# Allegro board flyer.brd
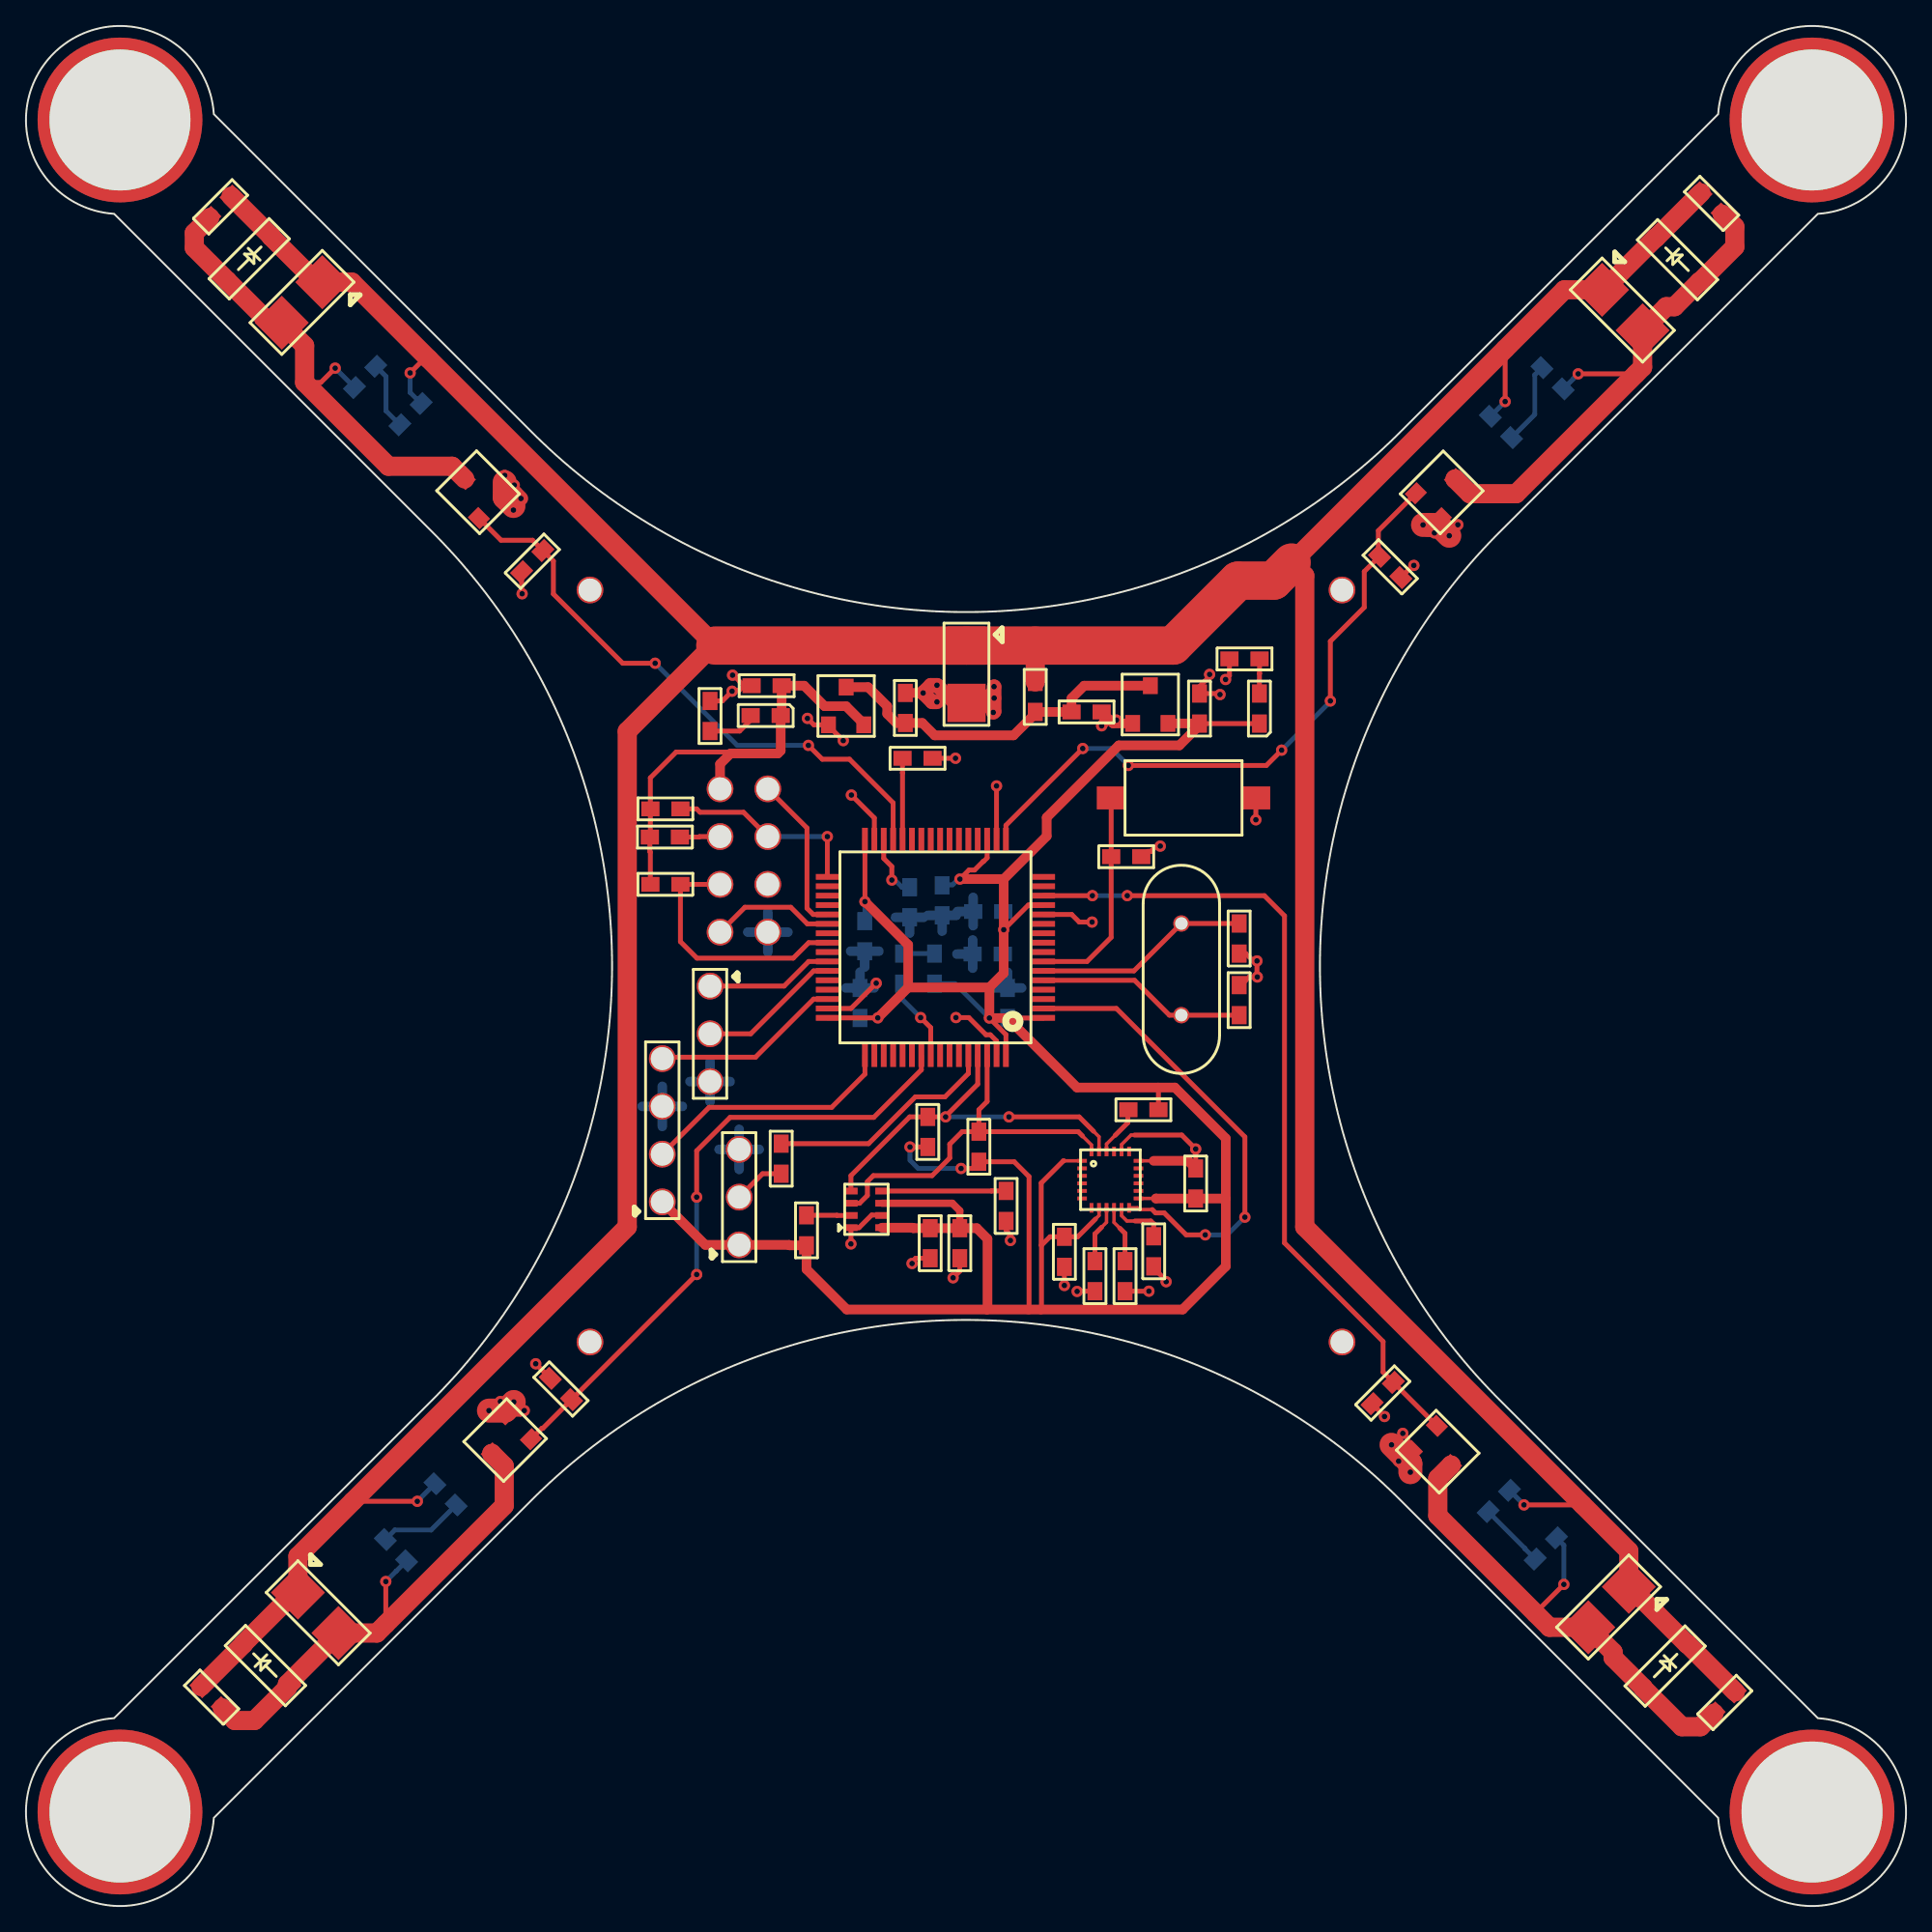
[diagram p0: board, top side]
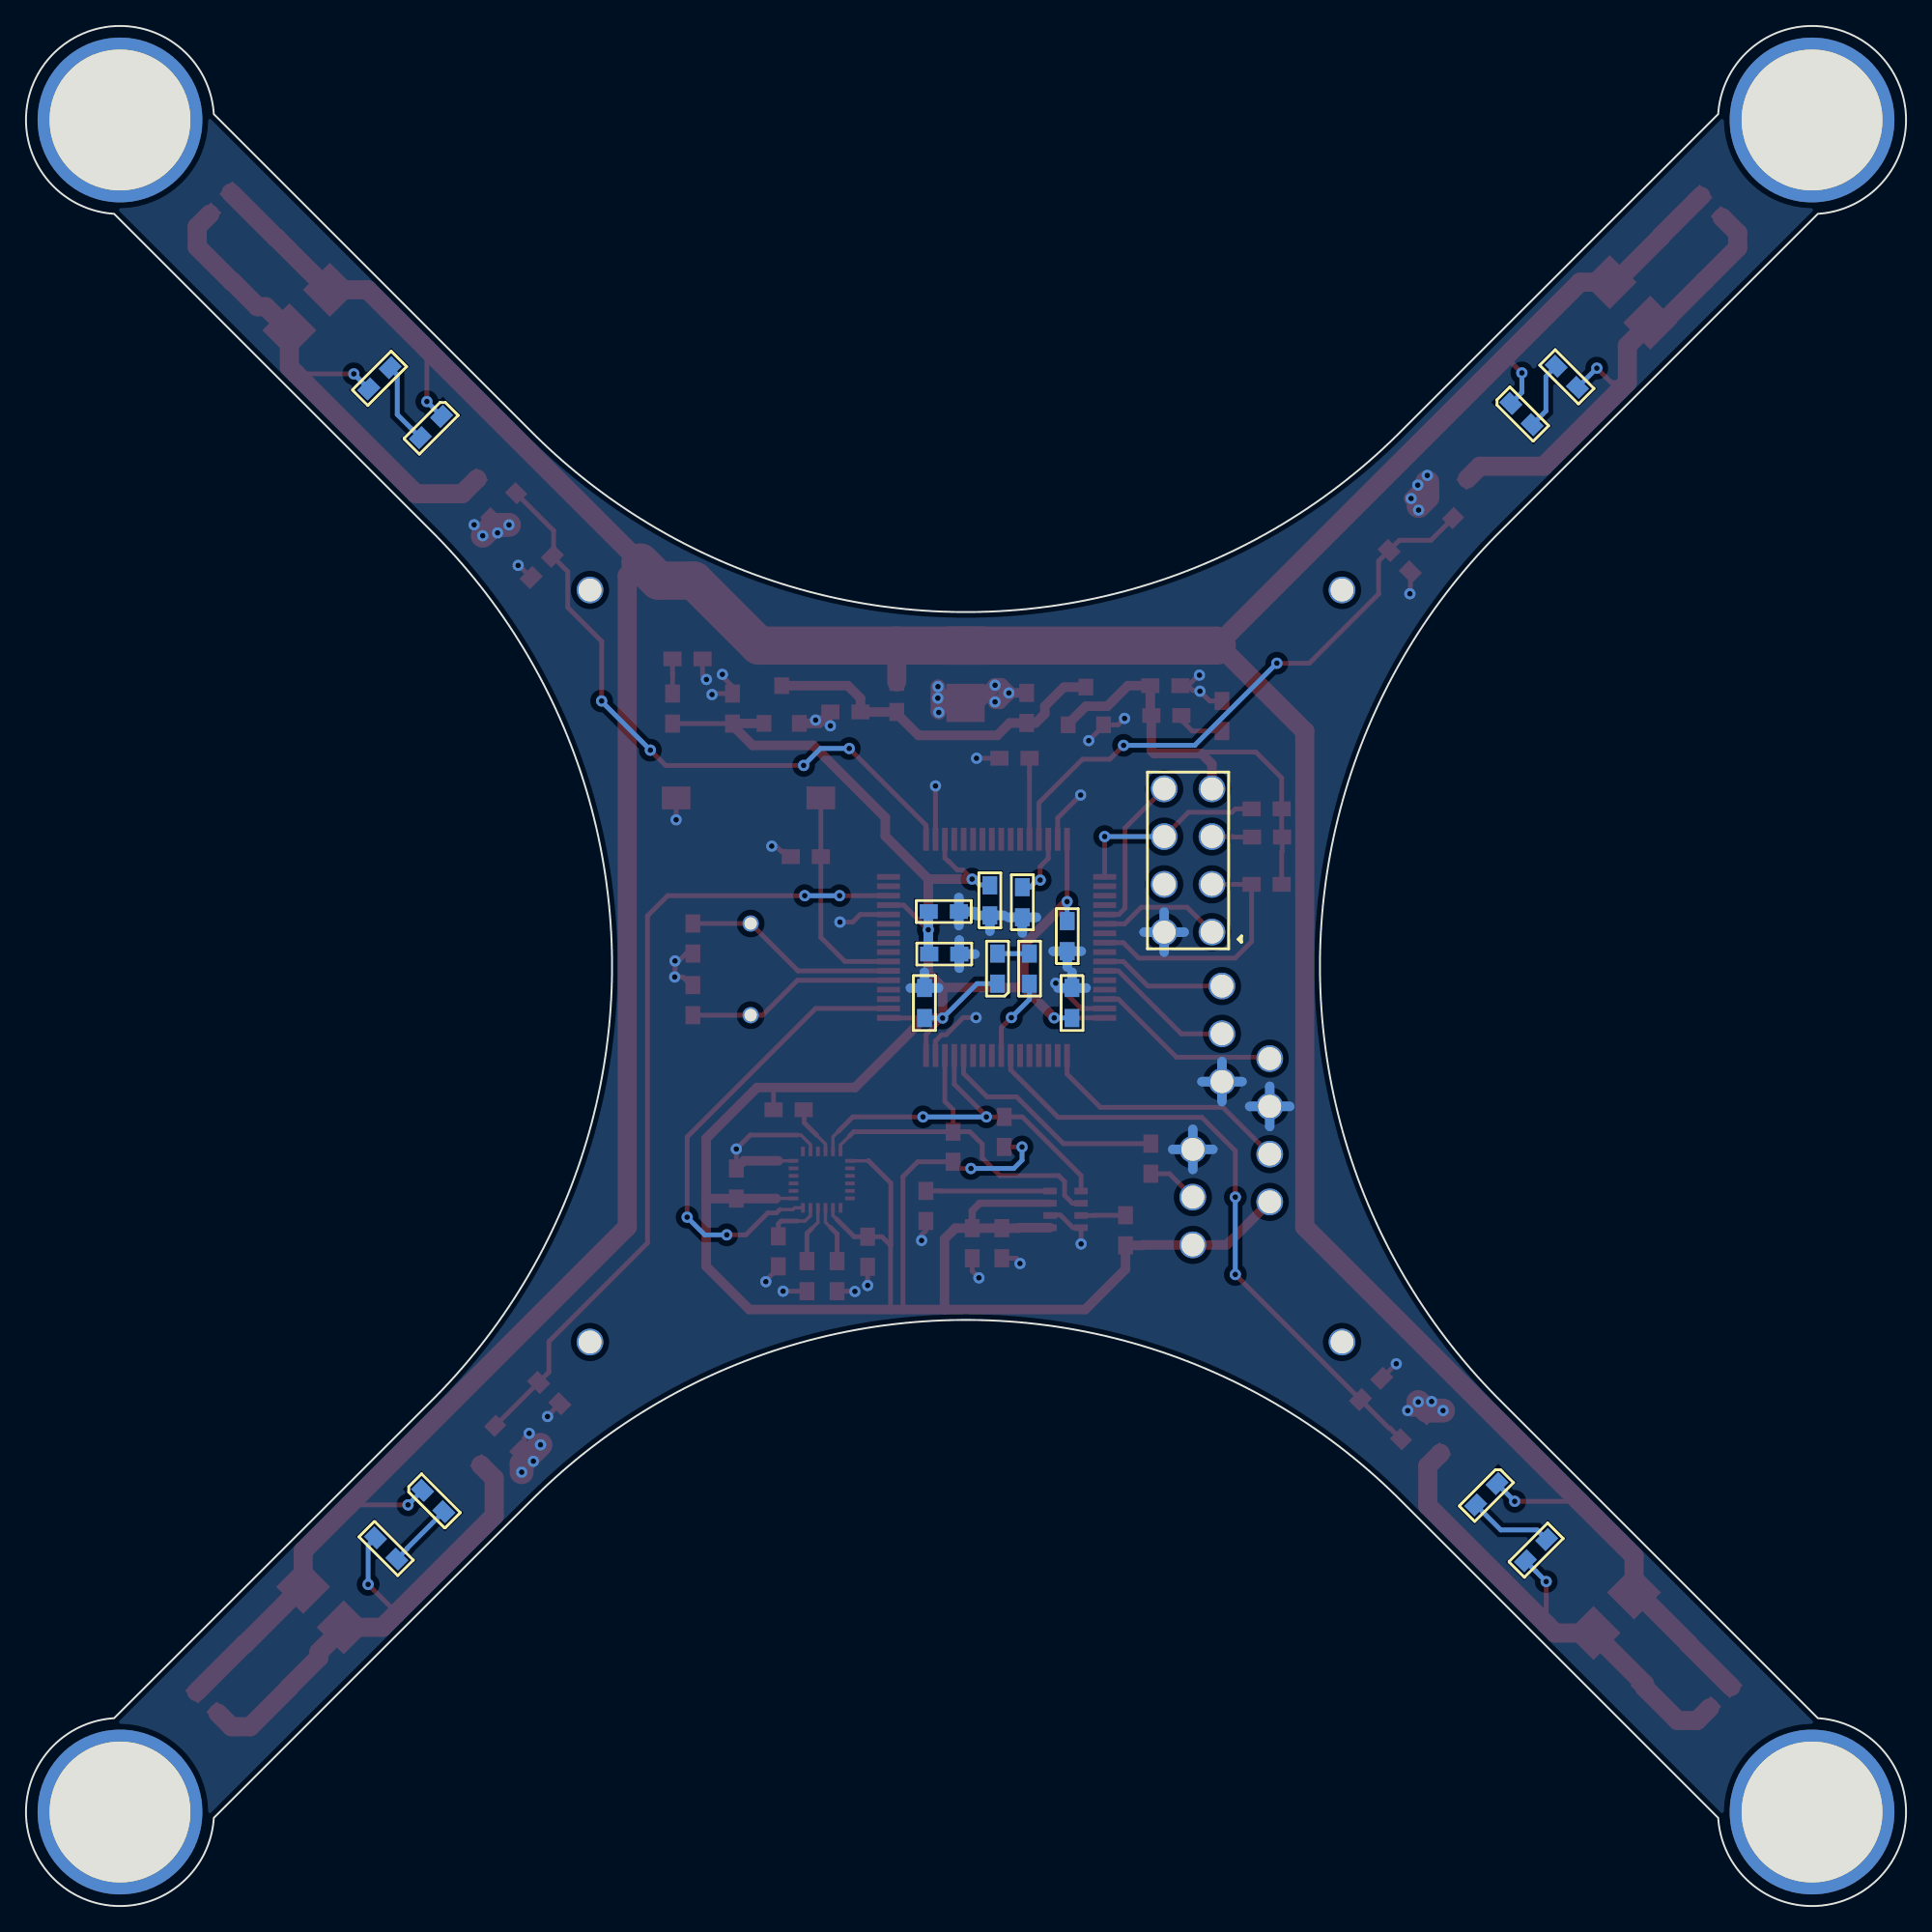
[diagram p1: board, bottom side, seen from below]

Outline 100 x 100 mm; copper layers: TOP, BOTTOM. Coordinates in mm from the lower left corner of the outline.

## Placement (name value [footprint] x y rotation side)
C1  1u  [NP0603]  55.61 63.51 0 top
C2  1u  [NP0603]  62.42 62.89 90 top
C3  1u  [NP0603]  46.77 62.92 90 top
C4  1u  [NP0603]  40.19 64.91 180 top
C5  100n  [NP0603]  59.32 55.81 180 top
C6  20p  [NP0603]  64.52 47.38 90 top
C7  20p  [NP0603]  64.52 52.26 270 top
C8  4.7u  [NP0603]  47 54.19 270 bottom
C9  1u  [NP0603]  51.95 50.63 180 bottom
C10  100n  [NP0603]  51.98 52.89 180 bottom
C11  100n  [NP0603]  48.73 54.29 270 bottom
C12  100n  [NP0603]  44.61 52.38 270 bottom
C13  100n  [NP0603]  44.36 47.23 90 bottom
C14  100n  [NP0603]  52.21 47.23 90 bottom
C15  100n  [NP0603]  10.9 90.94 225 top
C16  100n  [NP0603]  89.09 91.12 315 top
C17  100n  [NP0603]  58.45 34.3 270 top
C18  100n  [NP0603]  90.91 11.39 225 top
C19  10n  [NP0603]  55.23 35.59 270 top
C20  100n  [NP0603]  62.21 37.63 90 top
C21  100n  [NP0603]  9.3 11.67 315 top
C22  100n  [NP0603]  48.09 36.05 270 top
C23  100n  [NP0603]  49.67 36.05 270 top
D1  LED  [P0603]  65.6 62.89 90 top
D2  LED  [P0603]  40.14 63.32 180 top
D3  IN5819W  [SOD123]  11.87 87.61 225 top
D4  LED  [P0603]  21.01 79.92 225 bottom
D5  IN5819W  [SOD123]  87.84 87.56 315 top
D6  LED  [P0603]  77.88 79.23 315 bottom
D7  IN5819W  [SOD123]  87.18 12.76 225 top
D8  LED  [P0603]  78.9 22.11 225 bottom
D9  IN5819W  [SOD123]  12.73 12.78 315 top
D10  LED  [P0603]  21.75 22.46 315 bottom
D11  LED  [P0603]  48.32 49.06 90 bottom
J1  BAT  [PWR]  50.02 67.04 270 top
J2  SWD  [SIP_2D54_4P]  33.84 37.45 90 top
J3  MOTOR1  [PWR]  15.76 86.37 225 top
J4  MOTOR2  [PWR]  83.83 85.96 315 top
J5  MOTOR3  [PWR]  85.25 16.98 225 top
J6  MOTOR4  [PWR]  14.46 16.67 315 top
J7  ESP8266  [DIP_2D54_8P]  36.91 51.8 90 bottom
J8  BOOT  [SIP_2D54_3P]  37.93 35.16 90 top
J9  BOOT  [SIP_2D54_3P]  36.38 48.93 270 top
NOREF  -  [unnamed]  50 50 0 top
Q1  SI2302DS  [SOT23_3]  24.09 73.82 45 top
Q2  SI2302DS  [SOT23_3]  73.92 75.14 315 top
Q3  SI2302DS  [SOT23_3]  75.04 25.54 225 top
Q4  SI2302DS  [SOT23_3]  26.86 24.82 135 top
R1  FUSE  [NP0603]  53.68 65.11 270 top
R2  10k  [NP0603]  65.61 66.33 180 top
R3  10k  [NP0603]  36.38 62.49 90 top
R4  10k  [NP0603]  40.17 40.55 270 top
R5  10k  [NP0603]  48.22 61.04 180 top
R6  4.7k  [NP0603]  50.68 39.58 90 top
R7  4.7k  [NP0603]  47.96 40.37 90 top
R8  10k  [NP0603]  60.23 42.35 180 top
R9  10k  [NP0603]  18.6 81.9 225 bottom
R10  10k  [NP0603]  80.63 81.82 315 bottom
R11  10k  [NP0603]  27.49 72.09 225 top
R12  10k  [NP0603]  71.99 71.79 315 top
R13  10k  [NP0603]  56.85 34.3 270 top
R14  10k  [NP0603]  59.98 35.62 270 top
R15  10k  [NP0603]  80.27 18.45 45 bottom
R16  10k  [NP0603]  19.11 19.49 315 bottom
R17  10k  [NP0603]  72.73 27.85 225 top
R18  10k  [NP0603]  29.01 26.93 135 top
R19  10k  [NP0603]  41.51 35.14 90 top
R20  10k  [NP0603]  33.21 54.34 0 top
R21  10k  [NP0603]  33.18 56.85 0 top
R22  10k  [NP0603]  52.13 38.03 270 top
R23  10k  [NP0603]  33.21 58.35 0 top
R24  10k  [NP0603]  46.62 50.66 270 bottom
SW1  PUSHBUTTON  [SW_RST]  57.72 58.94 0 top
U1  XC6206P33  [SOT23_3]  58.86 62.9 0 top
U2  XC6206P33  [SOT23_3]  42.68 62.82 0 top
U3  STM32F401RBT6  [LQFP64]  48.37 50.99 180 top
U4  MPU9250  [QFN24]  56.32 39.63 0 top
U5  BMP280  [LGA8]  43.98 36.08 180 top
Y1  8M  [HC49S]  61.45 49.82 270 top

## Library data of the parts
C1-C23 = CAP NP
D1 D2 D4 D6 D8 D10 D11 = LED
D3 D5 D7 D9 = IN5819W
J1 J3-J6 = HEADER 2
J2 = 4 HEADER
J7 = HEADER 4X2
J8 J9 = HEADER 3
Q1-Q4 = SI2302DS
R1-R24 = R
SW1 = PUSHBUTTON
U1 U2 = XC6206P332MR
U3 = STM32F401RBT6
U4 = MPU9250
U5 = BMP280
Y1 = ZTA

## Footprints (pads in the part's own frame, mm; a bottom-side part is the same pattern mirrored in y, then rotated)
DIP_2D54_8P
  round 1.422 hole 1.219: 1(0,0) 2(0,2.54) 3(2.54,0) 4(2.54,2.54) 5(5.08,0) 6(5.08,2.54) 7(7.62,0) 8(7.62,2.54)
HC49S
  round 0.864 hole 0.66: 1(-2.438,0) 2(2.438,0)
LGA8
  rect 0.711x0.356 smd: 1(0.102,0) 2(0.102,-0.65) 3(0.102,-1.3) 4(0.102,-1.95) 5(-1.55,-1.95) 6(-1.55,-1.3) 7(-1.55,-0.65) 8(-1.549,0)
LQFP64
  rect 1.219x0.305 smd: 1(-5.75,3.75) 2(-5.75,3.25) 3(-5.75,2.75) 4(-5.75,2.25) 5(-5.75,1.75) 6(-5.75,1.25) 7(-5.75,0.75) 8(-5.75,0.25) 9(-5.75,-0.25) 10(-5.75,-0.75) 11(-5.75,-1.25) 12(-5.75,-1.75) 13(-5.75,-2.25) 14(-5.75,-2.75) 15(-5.75,-3.25) 16(-5.75,-3.75) 33(5.75,-3.75) 34(5.75,-3.25) 35(5.75,-2.75) 36(5.75,-2.25) 37(5.75,-1.75) 38(5.75,-1.25) 39(5.75,-0.75) 40(5.75,-0.25) 41(5.75,0.25) 42(5.75,0.75) 43(5.75,1.25) 44(5.75,1.75) 45(5.75,2.25) 46(5.75,2.75) 47(5.75,3.25) 48(5.75,3.75)
  rect 0.305x1.219 smd: 17(-3.75,-5.75) 18(-3.25,-5.75) 19(-2.75,-5.75) 20(-2.25,-5.75) 21(-1.75,-5.75) 22(-1.25,-5.75) 23(-0.75,-5.75) 24(-0.25,-5.75) 25(0.25,-5.75) 26(0.75,-5.75) 27(1.25,-5.75) 28(1.75,-5.75) 29(2.25,-5.75) 30(2.75,-5.75) 31(3.25,-5.75) 32(3.75,-5.75) 49(3.75,5.75) 50(3.25,5.75) 51(2.75,5.75) 52(2.25,5.75) 53(1.75,5.75) 54(1.25,5.75) 55(0.75,5.75) 56(0.25,5.75) 57(-0.25,5.75) 58(-0.75,5.75) 59(-1.25,5.75) 60(-1.75,5.75) 61(-2.25,5.75) 62(-2.75,5.75) 63(-3.25,5.75) 64(-3.75,5.75)
NP0603
  rect 0.965x0.787 smd: 1(0,0) 2(1.6,0)
P0603
  rect 0.965x0.787 smd: 1(0,0) 2(1.6,0)
PWR
  rect 2.032x2.032 smd: 1(0,0) 2(3.048,0)
QFN24
  rect 0.508x0.203 smd: 1(-0.15,0) 2(-0.15,-0.4) 3(-0.15,-0.8) 4(-0.15,-1.2) 5(-0.15,-1.6) 6(-0.15,-2) 13(2.85,-2) 14(2.85,-1.6) 15(2.85,-1.2) 16(2.85,-0.8) 17(2.85,-0.4) 18(2.85,0)
  rect 0.203x0.508 smd: 7(0.35,-2.5) 8(0.75,-2.5) 9(1.15,-2.5) 10(1.55,-2.5) 11(1.95,-2.5) 12(2.35,-2.5) 19(2.35,0.5) 20(1.95,0.5) 21(1.55,0.5) 22(1.15,0.5) 23(0.75,0.5) 24(0.35,0.5)
SIP_2D54_3P
  round 1.422 hole 1.219: 1(0,0) 2(2.54,0) 3(5.08,0)
SIP_2D54_4P
  round 1.422 hole 1.219: 1(0,0) 2(2.54,0) 3(5.08,0) 4(7.62,0)
SOD123
  rect 0.914x1.219 smd: 1(-1.651,0) 2(1.651,0)
SOT23_3
  rect 0.787x0.889 smd: 1(0,0) 2(1.88,0) 3(0.94,2.007)
SW_RST
  rect 1.524x1.219 smd: 1(0,0) 2(7.696,0)
unnamed
  round 8.763 hole 7.493: (-45,45) (-45,-45) (45,45) (45,-45)
  round 1.422 hole 1.219: (-20,20) (-20,-20) (20,20) (20,-20)

## Nets
GND: C1.2 C2.2 C3.2 C4.2 C5.1 C6.2 C7.2 C8.2 C9.2 C10.2 C11.2 C12.2 C13.2 C14.2 C17.2 C19.2 C20.2 C22.2 C23.2 J1.2 J2.3 J7.2 J8.3 J9.3 Q1.2(SOURCE) Q2.2(SOURCE) Q3.2(SOURCE) Q4.2(SOURCE) R2.2 R3.2 R5.1 R11.2 R12.2 R13.2 R14.2 R17.2 R18.2 R22.2 SW1.2 U1.1(GND) U2.1(GND) U3.12(VSSA) U3.18(VSS_18) U3.31(VSS_31) U3.47(VSS_47) U3.63(VSS_63) U4.18(GND1) U4.20(GND2) U5.1(GND1) U5.7(GND7)
V3D3: C2.1 C9.1 C10.1 C11.1 C12.1 C13.1 C14.1 C19.1 C20.1 C22.1 C23.1 D1.1 D11.1 J2.1 J8.1 R6.1 R7.1 R8.1 R19.1 U1.2(VOUT) U3.1(VBAT) U3.13(VDDA) U3.19(VDD_19) U3.32(VDD_32) U3.48(VDD_48) U3.64(VDD_64) U4.1(RESV1) U4.8(VDDIO) U4.13(VDD) U5.6(VDDIO) U5.8(VDD)
V3D3R: C4.1 D2.1 J7.7 R20.1 R21.1 R23.1 U2.2(VOUT)
VBAT: C15.1 C16.1 C18.1 C21.1 D3.1 D4.1 D5.1 D6.1 D7.1 D8.1 D9.1 D10.1 J1.1 J3.1 J4.1 J5.1 J6.1 R1.1
VBATM: C1.1 C3.1 R1.2 U1.3(VIN) U2.3(VIN)
BOOT0: R4.1 U3.60(BOOT0)
BOOT1: R5.2 U3.28(BOOT1)
INT0: U3.2(PC13) U4.12(INT)
MLED: R24.2 U3.56(PB4)
NRST: C5.2 SW1.1 U3.7(NRST)
OSC_IN: C6.1 U3.5(OSC_IN) Y1.2
OSC_OUT: C7.1 U3.6(OSC_OUT) Y1.1
PWM1: Q1.1(GATE) R11.1 U3.29(PB10)
PWM2: Q2.1(GATE) R12.1 U3.17(PA3)
PWM3: Q3.1(GATE) R17.1 U3.14(PA0)
PWM4: Q4.1(GATE) R18.1 U3.55(PB3)
RX1: J9.2 U3.43(PA10)
RX6: J7.1 U3.38(PC7)
SCL1: R7.2 U3.61(PB8) U4.23(SCL) U5.4(SCL)
SDA1: R6.2 U3.62(PB9) U4.24(SDA) U5.3(SDA)
SWCLK: J2.2 U3.49(PA14)
SWDIO: J2.4 U3.46(PA13)
TX1: J9.1 U3.42(PA9)
TX6: J7.8 U3.37(PC6)
WMODE: J7.6 R23.2 U3.33(PB12)
WPWR: J7.3 R20.2 U3.40(PC9)
N152808: D4.2 R9.1
N153644: D1.2 R2.1
N167735: J7.5 R21.2
N184406: R13.1 U4.9(ADO)
N184550: C17.1 U4.10(REGOUT)
N251743: R8.2 U4.22(NCS)
N267263: R22.1 U5.5(SDO)
N268631: R19.2 U5.2(CSB)
N270769: R14.1 U4.11(FSYNC)
N333072: D2.2 R3.1
N333731: C15.2 D3.2 J3.2 Q1.3(DRAIN) R9.2
N335075: C16.2 D5.2 J4.2 Q2.3(DRAIN) R10.2
N335165: D6.2 R10.1
N336074: C18.2 D7.2 J5.2 Q3.3(DRAIN) R15.2
N336144: D8.2 R15.1
N336592: C21.2 D9.2 J6.2 Q4.3(DRAIN) R16.2
N336678: D10.2 R16.1
N341353: C8.1 U3.30(VCAP_1)
N360005: J8.2 R4.2
N366767: D11.2 R24.1

Pads without a net: J7 4; U3 3 4 8 9 10 11 15 16 20 21 22 23 24 25 26 27 34 35 36 39 41 44 45 50 51 52 53 54 57 58 59; U4 2 3 4 5 6 7 14 15 16 17 19 21

## Via types
v1: diameter 0.6, hole 0.3, TOP to BOTTOM, 86 vias

## Routing (per net, layer and track width the routed paths; a pad name or vN(x,y) marks a point on that pad's centre or on a via; arc(x,y) is an arc through that point)
GND: length 123.4
  TOP w0.178: 58.96,41 58.77,41 58.27,40.5 U4.20 ; U4.18 59.98,39.63
  TOP w0.254: C1.2 v1(57.21,62.77) ; v1(63.51,64.43) 63.45,64.49 C2.2 62.42,64.86 62.95,65.4 v1(62.95,65.51) ; Q2.2 74.96,73.81 74.61,73.46 ; Q2.2 75.6,73.46 v1(76.16,73.46) ; Q2.2 75.25,73.37 ; 73.7,24.21 Q3.2 73.71,23.64 73.63,23.56 73.63,23.53 ; 73.7,24.21 73.56,24.21 ; 73.7,24.21 73.49,24.42 73.49,24.87 v1(73.23,25.14) ; 75.25,73.37 v1(74.91,73.03) ; 75.25,73.37 75.25,73.33 ; v1(37.58,65.46) 37.63,65.46 38.18,64.91 ; v1(60.33,56.37) 60.1,56.37 59.83,56.09 59.67,56.09 59.39,55.81 C5.1 ; C19.2 v1(55.23,33) ; Q4.2 24.82,26.15 v1(24.62,26.35) ; Q4.2 25.53,26.53 v1(25.23,26.83) ; Q4.2 26.31,26.15 v1(26.5,26.35) ; C22.2 47.32,34.45 47.13,34.26 v1(47.13,34.17) ; Q1.2 25.42,75.18 25.81,75.57 v1(25.97,75.57) ; Q1.2 26.03,75.15 25.92,75.04 25.92,74.64 Q1.2 ; Q1.2 25.01,75.56 25.01,75.91 25.19,76.09 v1(25.46,76.09) ; 73.56,24.21 v1(73.01,23.66) ; 73.56,24.21 73.17,24.21 72.85,24.53 v1(72.63,24.53) ; v1(49.46,47.25) 50.14,47.25 51.06,46.34 51.29,46.34 51.62,46.01 U3.63 ; R14.2 59.98,33.93 60.64,33.27 v1(60.64,33.2) ; v1(43.47,61.98) 42.68,62.77 U2.1 41.91,62.82 v1(41.56,63.17) ; v1(49.31,33.41) 49.67,33.76 C23.2 ; v1(43.9,59.09) 45.12,57.87 U3.31 ; C20.2 v1(62.21,40.26) 61.47,41 58.96,41 ; v1(55.91,32.69) 55.92,32.7 R13.2 ; v1(73.82,71.3) 73.77,71.3 R12.2 ; 38.18,64.91 37.93,64.65 37.6,64.65 v1(37.55,64.61) 37.04,64.09 36.38,64.09 ; 38.18,64.91 C4.2 ; R18.2 v1(27.11,28.84) ; C17.2 v1(59.72,32.7) ; 50.51,63.99 51.38,64.85 v1(51.49,64.85) 51.49,65.07 ; U3.18 v1(51.62,59.57) ; C7.2 64.88,50.66 65.27,50.26 v1(65.47,50.26) 65.47,49.43 v1(65.49,49.41) 65.06,49.41 64.63,48.98 C6.2 ; R2.2 64.01,65.44 v1(63.8,65.24) ; R22.2 52.13,35.92 52.36,35.7 v1(52.36,35.4) ; v1(72.26,26.03) 72.02,26.27 72.02,26.29 R17.2 ; U5.7 45.5,36.75 44.98,36.75 44.31,36.08 U5.1 v1(43.87,35.21) ; v1(45.22,49.08) 43.88,47.74 U3.47 ; SW1.2 v1(65.41,57.77) ; v1(26.32,74.86) 25.92,74.46 v1(25.92,74.24) ; U3.12 55.62,52.74 56.02,52.33 v1(56.7,52.33) ; R11.2 26.36,69.82 v1(26.39,69.8) ; R5.1 v1(49.44,61.04)
  TOP w0.508: v1(57.21,62.77) 57.51,63.08 v1(58,63.08) ; C3.2 47.71,64.52 v1(47.72,64.52) ; 59.98,39.63 61.81,39.63 C20.2 ; 48.5,64.88 48.5,64.88 49.39,63.99 49.39,63.99 ; C1.2 57.82,62.9 U1.1
  TOP w0.762: J1.2 49.39,63.99 v1(48.45,64.93) 48.12,64.93 47.76,64.57 47.76,64.56 v1(47.72,64.52) 47.72,64.52 48.2,64.04 v1(48.45,64.04) ; v1(51.49,64.85) 51.49,64.85 v1(51.49,64.24) 51.49,63.53 v1(51.44,63.48) ; 25.46,75.73 v1(26.32,74.86)
  TOP w1.27: v1(25.94,26.81) 25.48,26.35 v1(24.62,26.35) ; 25.92,74.46 25.46,74.93 25.46,75.73 ; v1(72.63,24.53) 73.63,23.53 v1(73.63,23.07) ; v1(74.3,73.46) 75.12,73.46 v1(75.7,72.88)
  TOP w1.524: 50.51,63.99 J1.2
  BOTTOM w0.508: 39.45,50.73 J7.2 ; J7.2 38.39,51.8 ; J7.2 39.45,52.87 ; J7.2 40.52,51.8 ; 43.61,48.83 C13.2 ; C13.2 44.36,49.67 ; C13.2 45.11,48.83 ; 50.38,52.14 C10.2 ; C10.2 49.54,52.89 ; C10.2 50.38,53.64 ; C12.2 45.36,50.78 ; C12.2 44.61,49.94 ; C12.2 43.86,50.78 ; J8.3 39,40.24 ; J8.3 36.86,40.24 ; J8.3 37.93,41.31 ; J8.3 37.93,39.17 ; J2.3 33.84,43.6 ; J2.3 32.77,42.53 ; J2.3 34.91,42.53 ; J2.3 33.84,41.46 ; C8.2 47.75,52.59 ; C8.2 46.25,52.59 ; C8.2 47,51.75 ; 48.73,51.85 C11.2 ; C11.2 49.48,52.69 ; C11.2 47.98,52.69 ; 36.38,42.78 J9.3 ; J9.3 36.38,44.92 ; J9.3 37.45,43.85 ; J9.3 35.31,43.85 ; 51.46,48.83 C14.2 ; C14.2 52.21,49.67 ; C14.2 52.95,48.83 ; 50.35,49.88 C9.2 ; C9.2 49.51,50.63 ; C9.2 50.35,51.38
V3D3: length 173.4
  TOP w0.178: U4.13 60.1,37.63 ; 55.2,39.63 U4.1 ; 56.88,36.53 57.07,36.72 U4.8
  TOP w0.254: U3.19 51.12,55.75 50.93,55.56 50.91,55.56 50.45,55.1 50.15,55.1 v1(49.67,54.62) ; R7.1 v1(47.02,40.37) ; U3.48 v1(45.3,47.24) ; 54.01,35.14 54.47,35.59 C19.1 55.94,35.59 56.88,36.53 ; 54.01,35.14 54.01,31.75 53.98,31.72 ; 54.01,35.14 54,35.15 54,38.45 55.18,39.63 55.2,39.63 ; C2.1 D1.1 ; U3.1 54.11,47.23 C14.1 ; U3.64 52.12,46.35 v1(51.24,47.23) ; 60.21,43.53 60.23,43.51 R8.1 ; 53.32,31.72 53.35,31.75 53.35,38.79 52.56,39.58 R6.1 50.33,39.23 v1(49.73,39.23) ; U3.13 53.31,53.24 v1(52,51.93) ; U3.32 v1(44.62,53.42)
  TOP w0.381: U5.6 49.27,37.38 49.67,36.98 C23.1
  TOP w0.508: 60.1,37.63 60.1,37.63 C20.1 63.81,37.63 ; 52,54.62 v1(49.67,54.62) ; 52,54.62 54.29,56.9 54.29,57.89 58.12,61.73 61.35,61.73 62.42,62.8 C2.1 62.41,62.9 U1.2 ; 52,54.62 v1(52,51.93) 52,49.61 51.24,48.85 ; J2.1 36.13,35.16 J8.1 40.58,35.16 40.61,35.14 R19.1 41.51,33.87 43.65,31.72 51.11,31.72 ; 63.81,37.63 63.81,40.83 61.11,43.53 55.9,43.53 C14.1 v1(51.24,47.23) 51.24,48.85 ; 63.81,37.63 63.81,34.02 61.52,31.72 51.11,31.72 ; v1(45.3,47.24) 46.92,48.85 ; 46.92,48.85 51.24,48.85 ; 46.92,48.85 46.92,51.12 v1(44.62,53.42) ; 51.11,31.72 51.14,31.75 51.14,35.48 50.57,36.05 C23.1 C22.1 47.19,36.05 47.16,36.08 U5.8
  BOTTOM w0.254: v1(49.67,54.62) 49.59,54.62 49.28,54.31 48.75,54.31 C11.1 ; C14.1 v1(51.24,47.23) 49.41,49.06 D11.1 ; v1(44.62,53.42) 44.62,52.39 C12.1 ; C13.1 44.37,47.24 v1(45.3,47.24) ; v1(47.02,40.37) 47.02,39.66 47.45,39.23 v1(49.73,39.23)
  BOTTOM w0.508: C10.1 52,52.87 v1(52,51.93) 52,50.68 C9.1
V3D3R: length 24.2
  TOP w0.254: 40.14,64.85 C4.1 ; 37.47,61.3 37.4,61.37 34.58,61.37 33.21,60 R23.1 33.21,56.88 R21.1 33.18,56.08 33.21,56.05 R20.1
  TOP w0.508: U2.2 44.56,62.87 43.62,63.81 42.48,63.81 41.38,64.91 C4.1 40.19,63.37 D2.1 40.14,61.45 39.99,61.3 37.47,61.3 36.91,60.74 J7.7
VBAT: length 252.9
  TOP w0.254: v1(78.67,80.02) 78.67,82.81 ; v1(20.81,21.52) 17.38,21.52 ; 21.42,82.28 21.17,82.28 v1(20.43,81.54) 20.43,81.64 ; v1(79.68,21.33) 82.8,21.33
  TOP w1.016: C15.1 13.04,88.81 D3.1 15.45,86.37 J3.1 17.33,86.37 36.66,67.04 36.53,67.04 31.98,62.48 31.98,36.12 14.46,18.6 J6.1 14.29,16.67 D9.1 11.57,13.93 C21.1 ; R1.1 53.68,67.04 ; C16.1 86.7,88.73 D5.1 83.91,85.96 J4.1 81.82,85.96 67.32,71.46 68.01,70.76 68.01,36.12 85.25,18.88 J5.1 85.3,16.98 88.35,13.93 88.38,13.93 C18.1
  TOP w2.032: 67.32,71.46 66.35,70.49 64.47,70.49 61.01,67.04 J1.1 36.66,67.04
  BOTTOM w0.254: D8.1 v1(79.68,21.33) ; D4.1 20.43,80.5 v1(20.43,81.54) ; D10.1 v1(20.81,21.52) ; D6.1 v1(78.67,80.02)
VBATM: length 19.1
  TOP w0.508: U2.3 44.79,64.83 45.8,63.81 45.8,63.41 46.29,62.92 C3.1 47.67,62.92 48.33,62.26 52.52,62.26 53.68,63.42 R1.2 C1.1 55.61,64.23 56.28,64.91 U1.3
BOOT0: length 12.5
  TOP w0.254: R4.1 44.81,40.55 47.3,43.04 48.88,43.04 50.12,44.28 50.12,45.23 U3.60
BOOT1: length 4.3
  TOP w0.254: R5.2 46.62,60.27 46.62,60.27 U3.28
INT0: length 25
  TOP w0.178: 59.9,37.04 59.21,37.04 59.11,37.13 U4.12
  TOP w0.254: U3.2 58,47.74 64.83,40.9 v1(64.83,36.63) ; 59.9,37.04 60.08,36.86 60.54,36.86 61.7,35.7 v1(62.72,35.7)
  BOTTOM w0.254: v1(62.72,35.7) 63.89,35.7 v1(64.83,36.63)
MLED: length 4.4
  TOP w0.254: v1(47.58,47.25) 48.12,46.71 U3.56
  BOTTOM w0.254: R24.2 46.62,48.22 v1(47.58,47.25)
NRST: length 11.5
  TOP w0.254: U3.7 56.43,50.24 57.72,51.52 C5.2 SW1.1
OSC_IN: length 11.2
  TOP w0.254: U3.5 58.96,49.24 60.82,47.38 Y1.2 C6.1
OSC_OUT: length 11.4
  TOP w0.254: C7.1 Y1.1 58.93,49.74 U3.6
PWM1: length 31.3
  TOP w0.254: v1(41.61,61.73) 42.35,60.99 43.8,60.99 46.12,58.67 U3.29 ; Q1.1 25.27,72.64 26.94,72.64 R11.1 28.05,71.53 28.05,69.78 31.73,66.1 v1(33.46,66.1)
  BOTTOM w0.254: v1(41.61,61.73) 37.83,61.73 v1(33.46,66.1)
PWM2: length 34.5
  TOP w0.254: v1(66.78,61.48) 65.97,60.66 v1(58.63,60.66) ; v1(56.21,61.57) 52.12,57.48 U3.17 ; v1(69.38,64.09) 69.38,67.27 71.18,69.07 71.18,70.98 R12.1 71.93,71.85 71.93,73.15 Q2.1
  BOTTOM w0.254: v1(66.78,61.48) 69.38,64.07 v1(69.38,64.09) ; v1(56.21,61.57) 57.73,61.57 v1(58.63,60.66)
PWM3: length 43.7
  TOP w0.254: v1(58.57,53.74) 65.86,53.74 66.94,52.66 66.94,35.26 72.18,30.02 72.18,28.39 R17.1 Q3.1 ; U3.14 v1(56.72,53.74)
  BOTTOM w0.254: v1(56.72,53.74) v1(58.57,53.74)
PWM4: length 33.5
  TOP w0.254: U3.55 47.62,44.47 45.09,41.94 37.45,41.94 35.67,40.17 v1(35.67,37.7) ; Q4.1 27.44,25.41 27.49,25.41 R18.1 v1(35.67,33.59)
  BOTTOM w0.254: v1(35.67,37.7) v1(35.67,33.59)
RX1: length 7.6
  TOP w0.254: U3.43 41.89,49.74 38.54,46.39 J9.2
RX6: length 6.6
  TOP w0.254: J7.1 38.24,53.12 40.67,53.12 41.56,52.24 U3.38
SCL1: length 20.5
  TOP w0.178: 56.78,41.21 57.07,40.91 U4.23
  TOP w0.254: 48.88,41.97 50.62,43.71 U3.61 ; 48.88,41.97 R7.2 47,41.97 43.87,38.84 U5.4 ; 48.88,41.97 v1(48.91,41.97) ; 56.78,41.21 56.02,41.97 v1(52.28,41.97)
  BOTTOM w0.254: v1(48.91,41.97) v1(52.28,41.97)
SDA1: length 20.1
  TOP w0.178: 56.19,40.95 56.67,40.48 U4.24
  TOP w0.254: U5.3 44.34,37.38 44.75,37.79 44.75,38.53 45.07,38.84 48.19,38.84 49.13,39.78 49.13,40.52 49.79,41.18 R6.2 ; 56.19,40.95 55.96,41.18 R6.2 ; R6.2 50.68,42.35 51.12,42.79 U3.62
SWCLK: length 13.5
  TOP w0.254: U3.49 44.62,44.25 42.85,42.48 36.33,42.48 J2.2
SWDIO: length 10.1
  TOP w0.254: U3.46 41.89,48.24 38.8,45.14 33.92,45.14 J2.4
TX1: length 6.8
  TOP w0.254: U3.42 41.63,50.24 40.32,48.93 J9.1
TX6: length 8.4
  TOP w0.254: J7.8 41.54,57.34 41.54,53.07 41.87,52.74 U3.37
WMODE: length 10.6
  TOP w0.254: J7.6 38.16,58.17 35.85,58.17 35.67,58.35 R23.2 ; U3.33 v1(42.62,56.88)
  BOTTOM w0.254: J7.6 v1(42.62,56.88)
WPWR: length 13.7
  TOP w0.254: U3.40 41.63,51.24 40.81,50.41 35.68,50.41 34.81,51.29 R20.2 J7.3
N152808: length 3.6
  BOTTOM w0.254: D4.2 19.15,79.52 19.15,81.35 R9.1
N153644: length 1.8
  TOP w0.254: D1.2 65.6,65.55 65.61,65.56 R2.1
N167735: length 2.1
  TOP w0.254: R21.2 35.8,56.85 35.82,56.88 J7.5
N184406: length 3.1
  TOP w0.178: 57.21,36.1 57.47,36.36 U4.9
  TOP w0.254: R13.1 56.85,35.75 57.21,36.1
N184550: length 3.1
  TOP w0.178: U4.10 57.87,36.36 58.17,36.05
  TOP w0.254: C17.1 58.45,35.77 58.17,36.05
N251743: length 2.7
  TOP w0.178: U4.22 57.47,40.53 57.93,40.99
  TOP w0.254: R8.2 58.61,42.32 58.61,41.66 57.93,40.99
N267263: length 6.6
  TOP w0.254: R22.1 51.35,38.03 51.35,38.03 U5.5
N268631: length 2.4
  TOP w0.254: U5.2 43.14,36.73 43.13,36.74 R19.2
N270769: length 3
  TOP w0.178: 58.99,36.43 58.56,36.43 58.27,36.72 U4.11
  TOP w0.254: 58.99,36.43 59.83,36.43 59.98,36.28 R14.1
N333072: length 2.6
  TOP w0.254: D2.2 38.54,63.08 37.96,62.49 R3.1
N333731: length 26
  TOP w0.254: v1(16.44,81.8) 15.68,81.03 14.82,81.03
  TOP w1.016: Q1.3 22.66,76.58 19.27,76.58 14.82,81.03 14.82,82.99 13.6,84.21 J3.2 12.93,84.21 D3.2 10.7,86.45 8.95,88.2 8.95,88.98 C15.2
  BOTTOM w0.254: R9.2 16.44,81.79 v1(16.44,81.8)
N335075: length 28
  TOP w0.254: v1(82.56,81.49) 85.63,81.49
  TOP w1.016: Q2.3 76.01,75.9 76.79,75.12 79.26,75.12 85.98,81.84 J4.2 87.24,85.06 87.68,85.06 D5.2 89.04,86.39 90.89,88.25 90.89,89.31 C16.2
  BOTTOM w0.254: v1(82.56,81.49) 82.31,81.24 82.31,81.24 R10.2
N335165: length 4.4
  BOTTOM w0.254: D6.2 80.25,79.33 80.25,81.44 R10.1
N336074: length 27.6
  TOP w0.254: v1(81.8,17.1) 80.31,15.62 80.31,15.54
  TOP w1.016: C18.2 89.06,9.53 88.07,9.53 D7.2 86.01,11.61 84.41,13.22 84.41,13.5 J5.2 81.03,14.82 75.09,20.76 75.09,22.74 75.79,23.44 Q3.3
  BOTTOM w0.254: R15.2 81.8,19.19 v1(81.8,17.1)
N336144: length 3.6
  BOTTOM w0.254: D8.2 79.72,19.02 79.72,19 R15.1
N336592: length 27
  TOP w0.254: v1(19.13,17.25) 19.13,14.99
  TOP w1.016: C21.2 11.11,9.86 12.15,9.86 D9.2 13.9,11.8 J6.2 18.66,14.52 25.43,21.29 25.43,23.4 24.77,24.06 Q4.3
  BOTTOM w0.254: R16.2 19.69,17.81 19.69,17.81 v1(19.13,17.25)
N336678: length 4.5
  BOTTOM w0.254: R16.1 19.62,20 21.55,20 D10.2
N341353: length 3.5
  TOP w0.254: U3.30 45.62,55.72 46.05,55.29 v1(46.05,54.57)
  BOTTOM w0.254: C8.1 46.59,54.19 46.21,54.57 v1(46.05,54.57)
N360005: length 2.8
  TOP w0.254: R4.2 39.17,38.95 J8.2
N366767: length 1.7
  BOTTOM w0.254: D11.2 R24.1

## Copper pours and planes (outline as drawn; the poured copper is in the pictures)
GND on BOTTOM: 9.69,4.7 1.67,1.67 4.7,9.69 4.81,9.69 21.82,26.7 31.47,50 21.82,73.29 4.81,90.3 4.7,90.3 1.67,98.32 9.69,95.29 9.69,95.18 26.7,78.17 50,68.52 73.29,78.17 90.3,95.18 90.3,95.29 98.32,98.32 95.29,90.3 95.18,90.3 78.17,73.29 68.52,50 78.17,26.7 95.18,9.69 95.29,9.69 98.32,1.67 90.3,4.7 90.3,4.81 73.29,21.82 50,31.47 26.7,21.82 9.69,4.81 ; 1 cut-out
